# Altium PCB KOTROLER_TRANSPORTA.PcbDoc (part 2 of 4)
Units mm, origin at the board's own origin, x right, y up, seen from the top; angles counter-clockwise.
Board outline 160 x 100 mm, 2 copper layers (Top Layer, Bottom Layer); 436 components, 440 nets, 1414 pads, 154 vias.
Unrouted connection lines stored in the file: 1.
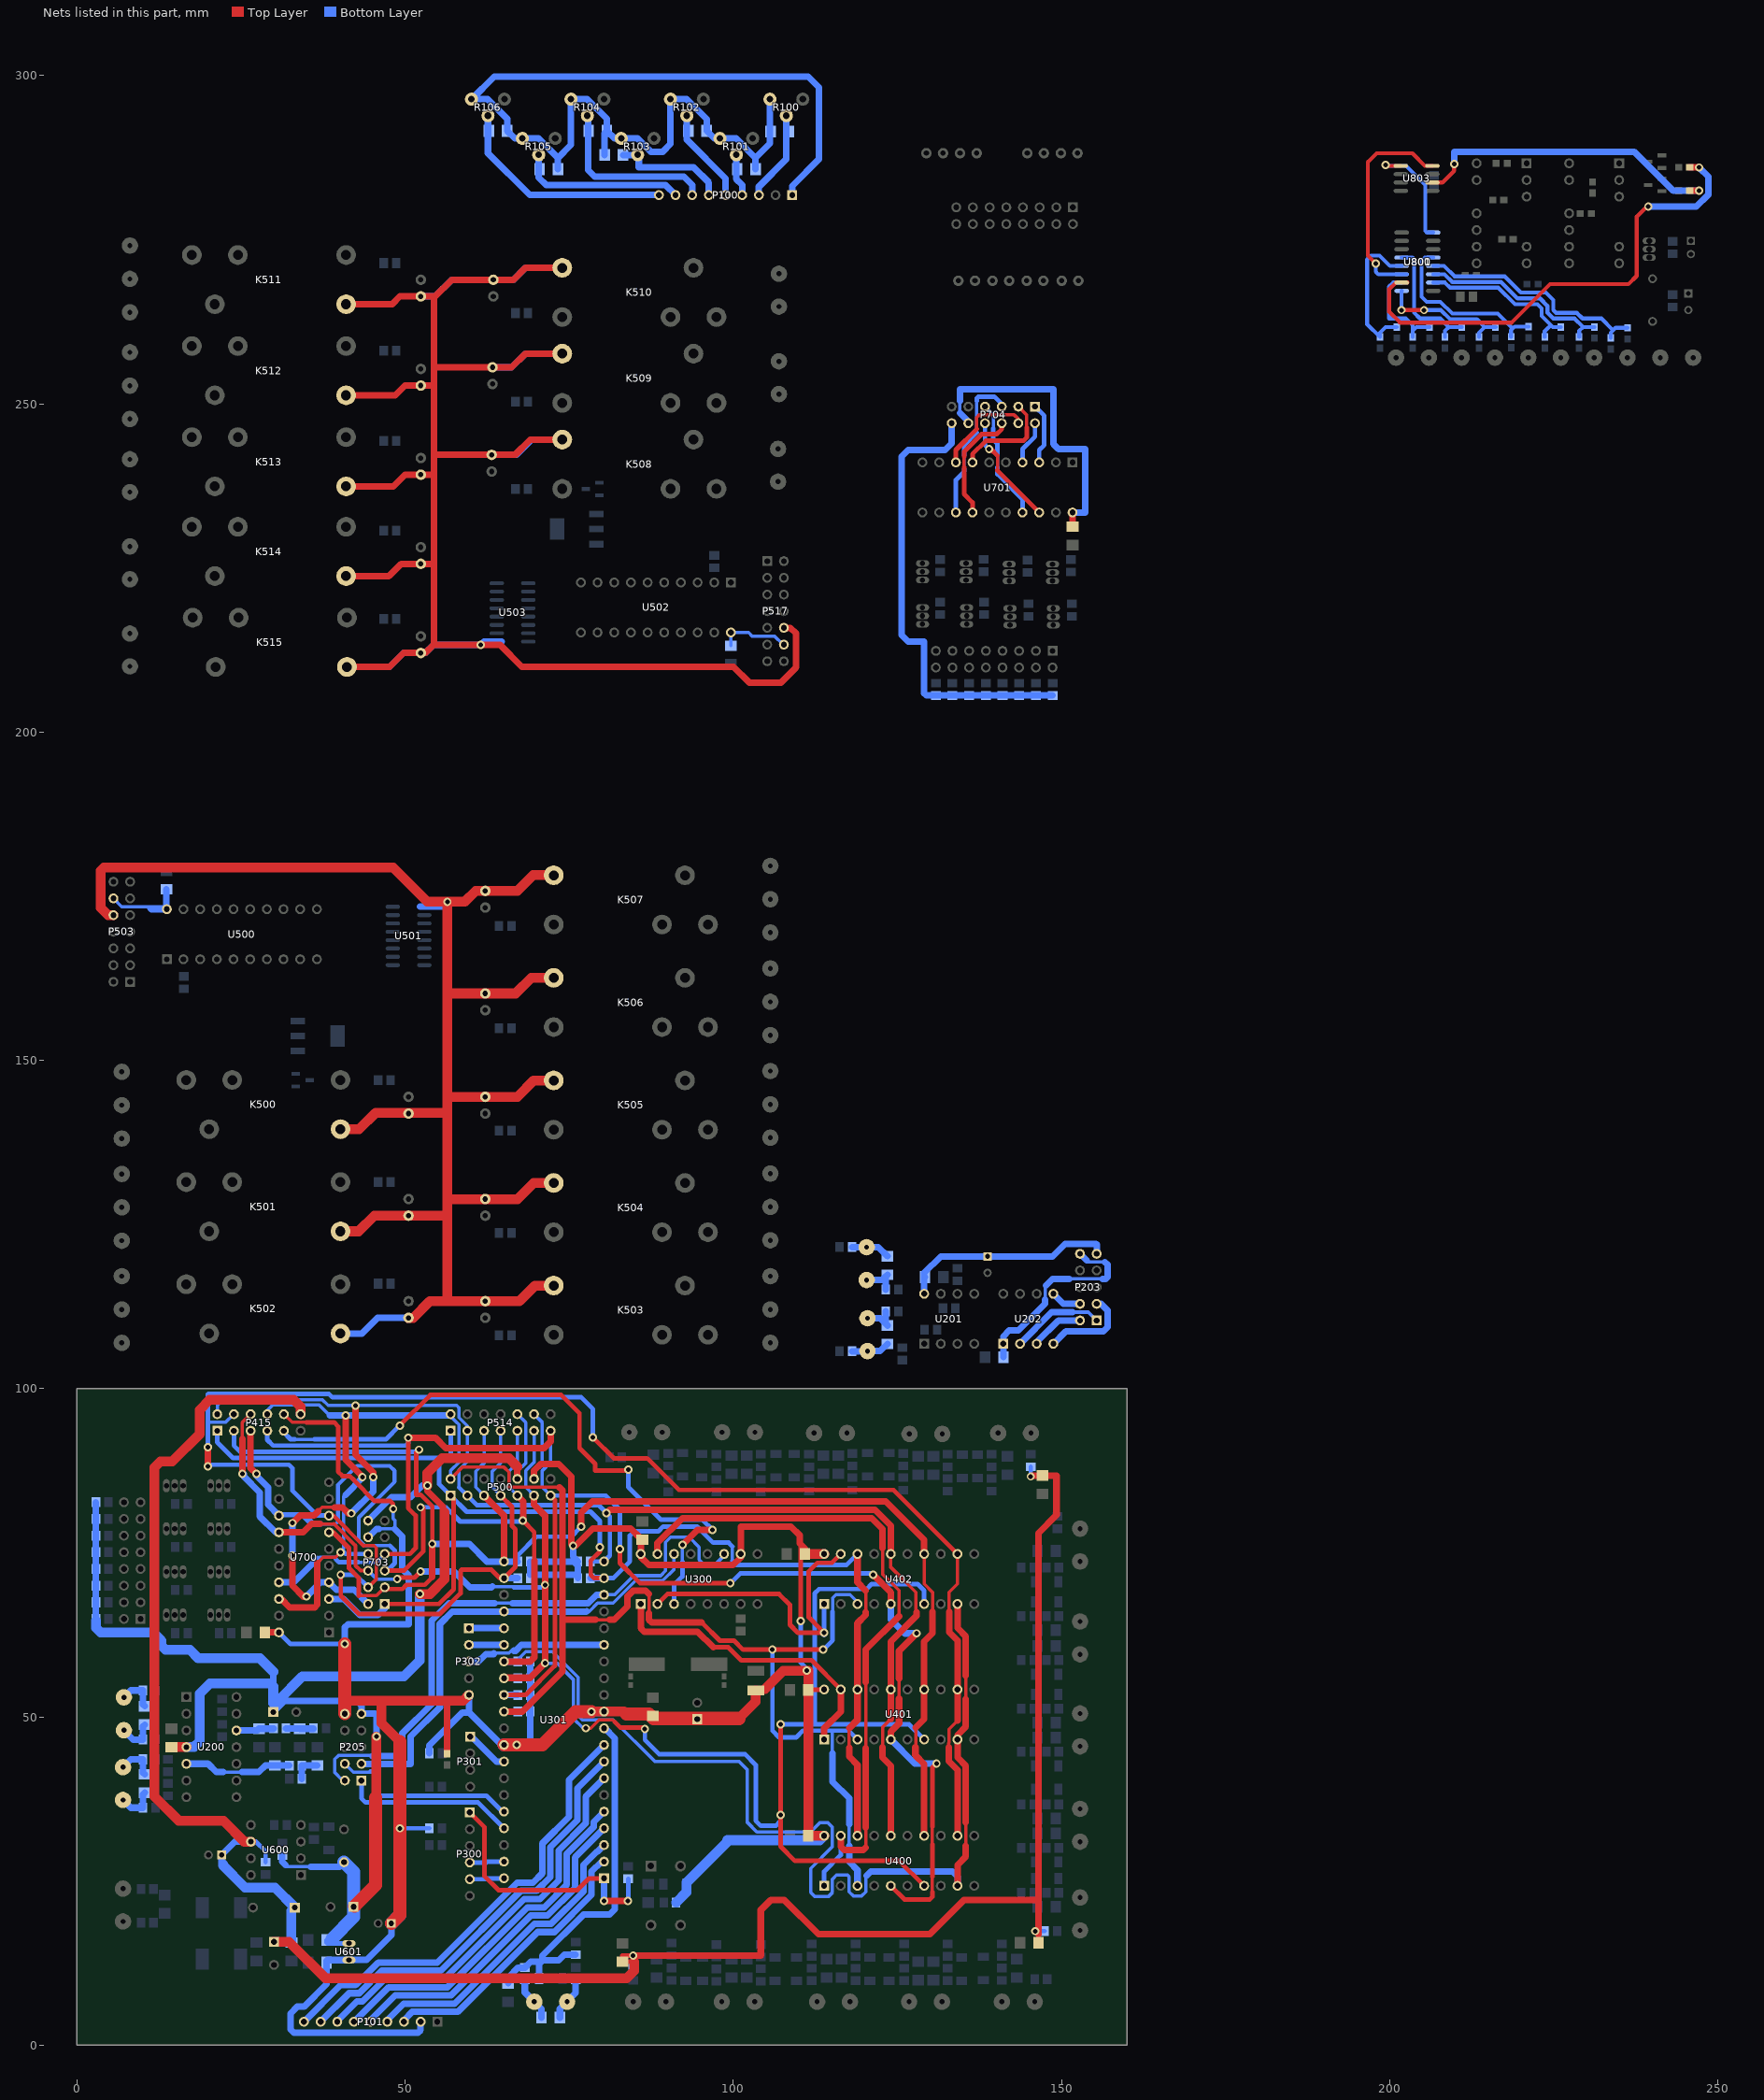
[diagram p2: the nets of this part, all layers, seen from the top]

## Via types
v1: diameter 1.27, hole 0.711, Top Layer to Bottom Layer, 154 vias

## Nets (pads, with @x,y where several pads share a name; then routed paths per layer and width w, separated by ;. In a path a pad name is that pad's centre, name@x,y a point inside that pad or via, vN(x,y) a via of type N, cw(c..) or ccw(c..) an arc to the next point about the centre after c; other vN are vias at no path point)
+5V: C300.1 C301.2 C302.1 C401.1 C411.1 C421.1 C607.2 C608.1 C700.1 D300.1 D602.2 P101.2 P205.10 P302.5 P415.10 P500.13 P514.13 P703.10 R300.1 R303.1 R305.2 R306.2 R307.2 R308.2 R309.2 R310.2 R311.2 R312.2 R313.2 R605.1 U300.10 U300.16 U301.11 U301.32 U400.20 U401.20 U402.20 U601.1 U700.20 | length 487.4
  Top Layer w0.5: P415.10@31.529,96.135 32.783,94.881 34.958,94.881
  Top Layer w0.7: 34.958,94.881 39.17,94.881 39.784,94.267 39.784,87.384 40.456,86.712 41.558,86.712 42.228,86.042 42.228,86.007 45.333,82.902 47.72,82.902 48.166,82.456 v1(48.166,81.694) ; v1@75.319,76.335 v1(75.565,76.088) ; C301.2@87.155,50.468 C301.2@87.155,50.722 ; D300.1@103.411,54.032 104.832,54.032 104.832,54.286 ; 109.95,76.436 110.244,76.143 v1(110.244,64.625) ; C421.1@110.907,74.836 C421.1@110.907,75.62 ; v1@111.12,57.348 v1@111.158,57.31 ; v1(111.158,57.056) v1@111.158,57.31 ; v1@111.158,57.386 v1@111.158,57.31 ; C411.1@111.415,54.135 113.825,54.135 U401.20@113.825,54.199 ; v1@111.415,57.053 v1@111.158,57.31
  Top Layer w1: C700.1@28.611,62.898 U700.20@30.767,62.898 ; R313.2@56.388,44.411 56.388,52.23 ; U301.32@64.549,45.753 U301.32@65.057,45.753 ; P500.13@69.629,86.266 69.629,87.536 70.645,88.552 73.373,88.552 75.311,86.614 75.311,76.327 75.565,76.073 75.946,76.073 78.613,78.74 84.328,78.74 85.885,77.183 U300.16@85.885,74.836 85.885,74.389 87.122,73.152 99.949,73.152 101.125,74.328 U300.10@101.125,74.836 101.125,78.994 108.778,78.994 110.091,77.681 110.091,76.436 C421.1@110.907,75.62
  Top Layer w1.5: 40.8,52.484 58.834,52.484 P302.5@59.723,53.373 ; 46.388,52.23 46.388,49.055 49.207,46.236 ; v1(78.392,50.833) U301.11@80.297,50.833 83.345,50.833 ; 100.838,49.784 103.411,52.357 D300.1@103.411,54.032 ; 104.832,54.286 107.602,57.056 v1(111.158,57.056) ; C421.1@110.907,74.836 U402.20@113.825,74.836 ; v1@111.415,57.053 C411.1@111.415,54.135 C401.1@111.415,31.91 U400.20@113.825,31.91
  Top Layer w2: P205.10@40.8,50.499 40.8,52.484 v1(40.8,61.12) ; C608.1@47.896,18.575 49.207,19.886 49.207,46.236 ; U301.32@65.057,45.753 v1(66.962,45.753) 70.899,45.753 75.979,50.833 v1(78.392,50.833) ; 83.71,50.468 C301.2@87.155,50.468 ; C301.2@87.301,50.322 87.839,49.784 100.838,49.784
  Bottom Layer w0.5: 46.007,78.646 48.42,78.646 48.42,79.956 48.166,80.21 v1(48.166,81.694) ; P500.13@69.629,86.266 69.629,87.536 70.899,88.806 70.899,94.865 P514.13@69.629,96.135
  Bottom Layer w0.7: U700.20@30.767,62.898 32.545,61.12 v1(40.8,61.12) ; v1(49.207,33.053) R300.1@53.693,33.053 ; D602.2@92.867,24.544 D602.2@92.867,24.773 ; v1(110.244,64.625) 110.244,58.301 111.158,57.386 v1@111.158,57.31
  Bottom Layer w1: v1(40.8,61.12) 40.8,63.66 41.275,64.135 50.579,64.135 50.579,71.534 49.563,72.55 49.563,77.503 48.42,78.646 ; P703.10@44.356,77.376 45.626,78.646 46.007,78.646 ; C608.1@47.896,18.575 47.896,16.786 44.113,13.003 41.451,13.003 U601.1@41.435,12.987 38.136,12.987 38.009,12.86 C607.2@38.009,12.606 38.009,9.307 34.577,5.875 33.561,5.875 32.545,4.859 32.545,2.446 33.053,1.938 51.976,1.938 52.357,2.319 P101.2@52.357,3.589 ; R303.1@53.693,44.483 53.693,45.692 58.707,50.706 59.723,50.706 ; P302.5@59.723,53.373 59.723,50.706 ; U301.32@65.057,45.753 64.676,45.753 59.723,50.706 ; v1(66.962,45.753) 68.232,45.753 69.055,46.576 R312.2@69.055,50.833 R311.2@69.055,53.373 R310.2@69.055,55.913 R309.2@69.055,58.453 ; v1(75.565,76.088) 75.565,74.427 R306.2@76.299,73.693 ; R305.2@76.299,71.153 R305.2@76.299,71.661 ; R305.2@76.299,71.661 69.055,71.661 R307.2@69.055,73.693 75.659,73.693 76.299,73.053 R305.2@76.299,71.661
  Bottom Layer w1.5: v1(78.392,50.833) U301.11@80.297,50.833 ; R605.1@91.28,21.75 92.867,23.337 D602.2@92.867,24.544 ; D602.2@92.867,24.773 99.082,30.988 ; 99.082,31.242 113.157,31.242 U400.20@113.825,31.91
  Bottom Layer w2: C608.1@47.896,18.575 49.207,19.886 v1(49.207,33.053) ; U301.32@65.057,45.753 v1(66.962,45.753)
+5V_DAC: C212.2 P203.10 U202.1 | length 31.1
  Bottom Layer w0.5: 147.496,113.587 147.496,115.619 147.607,115.73 ; 151.163,116.746 156.211,116.746 ; 153.83,119.54 154.068,119.302 156.608,119.302
  Bottom Layer w1: C212.2@141.133,104.808 141.13,104.811 U202.1@141.13,106.84 141.13,107.983 142.019,108.872 143.448,108.872 147.496,112.92 147.496,113.587 ; 147.607,115.73 148.623,116.746 151.163,116.746 ; P203.10@152.814,120.556 153.83,119.54 ; 156.211,116.746 156.751,116.746 157.005,117 157.005,118.905 156.608,119.302
+5V_O1: C501.1 P517.12 U502.20 | length 10.9
  Bottom Layer w0.5: C501.1@99.63,213.157 U502.20@99.63,215.186 102.297,215.186 102.853,214.631 106.282,214.631 107.568,213.345 P517.12@107.695,213.345
+5V_O2: C500.1 P503.12 U500.20 | length 14.3
  Bottom Layer w0.5: P503.12@5.558,174.681 6.828,173.411 13.305,173.411 13.622,173.094 U500.20@13.686,173.03
  Bottom Layer w1: 11.209,173.157 11.336,173.03 U500.20@13.686,173.03 ; U500.20@13.622,173.094 C500.1@13.622,176.075
+5V_SIG2: C701.1 P704.10 U701.20 | length 47.2
  Top Layer w1: C701.1@151.671,231.303 U701.20@151.671,233.459
  Bottom Layer w0.5: 134.526,248.572 134.526,250.477
  Bottom Layer w1: 134.526,248.572 135.796,247.302 P704.10@135.796,247.048 ; 134.526,250.477 134.526,252.255 148.75,252.255 148.75,243.873 149.512,243.111 153.576,243.111 153.576,233.459 U701.20@151.671,233.459
+12V: C200.2 C201.1 C606.1 C609.2 L602.2 P205.9 P500.12 P514.12 P703.12 R603.2 R704.2 R707.2 R710.2 R712.2 R714.2 R718.2 R720.2 R722.2 U200.4 U601.3 | length 251.6
  Top Layer w1: v1(53.373,85.25) 53.373,84.422 55.753,82.042 55.753,81.407 ; P500.12@67.089,86.266 67.089,88.105
  Top Layer w1.5: C200.2@14.384,45.416 14.387,45.419 U200.4@16.67,45.419 ; 45.466,37.719 45.626,37.879 v1(45.626,47.023) ; v1(52.23,68.74) 53.754,68.74 56.007,70.993 56.007,81.153 ; v1(53.373,85.25) 53.373,87.155 55.626,89.408 65.786,89.408 67.089,88.105
  Top Layer w2: C606.1@42.271,21.229 45.466,24.424 45.466,37.719
  Bottom Layer w0.5: 31.783,27.465 32.021,27.227 35.577,27.227 35.593,27.211 ; P500.12@67.089,86.266 67.089,87.409 68.359,88.679 68.359,94.865 P514.12@67.089,96.135
  Bottom Layer w0.7: C609.2@38.009,15.654 C609.2@38.009,16.035 ; C609.2@38.111,15.552 38.136,15.527 U601.3@41.435,15.527
  Bottom Layer w1: R722.2@2.893,82.71 R720.2@2.893,80.17 R718.2@2.893,77.63 R714.2@2.893,75.09 R712.2@2.893,72.55 R710.2@2.893,70.01 R707.2@2.893,67.47 R704.2@2.893,64.93 2.893,64.671 R704.2@2.921,64.643 ; 29.906,54.615 29.906,56.901 ; 30.64,52.484 30.259,52.484 29.906,52.131 C201.1@29.906,50.753 31.637,52.484 42.625,52.484 43.34,51.769 P205.9@43.34,50.499 45.452,50.499 45.626,50.325 v1(45.626,47.023) ; R603.2@31.275,28.928 31.275,27.973 31.783,27.465 ; 35.593,27.211 39.998,27.211 L602.2@40.673,27.886 ; P703.12@44.356,79.916 47.912,83.472 50.833,83.472 52.611,85.25 v1(53.373,85.25)
  Bottom Layer w1.5: R704.2@2.921,64.643 2.921,63.566 3.622,62.865 11.623,62.865 12.86,61.628 12.86,60.866 13.495,60.231 17.178,60.231 18.448,58.961 27.846,58.961 29.906,56.901 ; U200.4@16.67,45.419 17.813,45.419 18.702,46.308 18.702,53.547 20.273,55.118 29.403,55.118 ; 29.906,52.131 29.906,54.615 ; 30.64,52.484 34.323,56.167 49.817,56.167 52.23,58.58 v1(52.23,68.74)
  Bottom Layer w2: 38.862,16.256 42.169,19.563 42.169,21.877 42.169,26.39 L602.2@40.673,27.886
+12V_DAC: C208.2 C209.1 P203.9 U201.8 | length 32.9
  Bottom Layer w1: U201.8@129.065,114.46 C208.2@129.065,116.876 ; C208.2@129.189,117 C208.2@129.065,116.876 ; P203.9@155.354,120.556 155.354,121.953 155.227,122.08 150.528,122.08 148.603,120.155 C209.1@138.717,120.155 131.585,120.155 129.065,117.635 C208.2@129.065,116.876
+12V_O1: D508.1 D509.1 D510.1 D511.1 D512.1 D513.1 D514.1 D515.1 K508.1 K509.1 K510.1 K511.1 K512.1 K513.1 K514.1 K515.1 P517.10 U503.9 | length 323.5
  Top Layer w1: K514.1@41.004,223.778 47.516,223.778 49.376,225.638 D514.1@52.386,225.638 54.222,225.638 ; K513.1@41.004,237.431 48.215,237.431 49.998,239.214 D513.1@52.386,239.214 54.361,239.214 ; K512.1@41.004,251.305 48.5,251.305 49.986,252.791 D512.1@52.386,252.791 54.272,252.791 ; K511.1@41.004,265.18 48.024,265.18 49.211,266.367 D511.1@52.386,266.367 54.227,266.367 54.386,266.208 ; K515.1@41.131,209.935 47.643,209.935 49.769,212.061 D515.1@52.386,212.061 53.071,212.061 54.386,213.376 ; K508.1@73.928,244.567 69.067,244.567 66.737,242.237 D508.1@63.181,242.237 54.513,242.237 54.386,242.11 ; K509.1@73.928,257.648 68.305,257.648 66.229,255.572 D509.1@63.308,255.572 54.513,255.572 54.386,255.445 ; K510.1@73.928,270.729 68.305,270.729 66.483,268.907 D510.1@63.435,268.907 57.085,268.907 54.386,266.208 ; P517.10@107.695,215.885 108.711,215.885 109.536,215.059 109.536,209.852 107.25,207.566 102.421,207.566 100.008,209.979 67.766,209.979 64.464,213.281 v1(61.53,213.281) 54.481,213.281 54.386,213.376 ; 54.386,213.376 54.386,242.11 ; 54.386,242.11 54.386,255.445 ; 54.386,255.445 54.386,266.208
  Bottom Layer w1: K515.1@41.131,209.935 47.643,209.935 49.769,212.061 D515.1@52.386,212.061 53.071,212.061 54.291,213.281 v1(61.53,213.281) 62.038,213.789 U503.9@63.956,213.789 U503.9@64.705,213.789 ; D511.1@52.386,266.367 54.545,266.367 57.085,268.907 D510.1@63.435,268.907 66.483,268.907 68.305,270.729 K510.1@73.928,270.729 ; D508.1@63.181,242.237 66.918,242.237 69.248,244.567 K508.1@73.928,244.567 ; D509.1@63.308,255.572 66.229,255.572 68.305,257.648 K509.1@73.928,257.648
+12V_O2: D500.1 D501.1 D502.1 D503.1 D504.1 D505.1 D506.1 D507.1 K500.1 K501.1 K502.1 K503.1 K504.1 K505.1 K506.1 K507.1 P503.10 U501.9 | length 354.8
  Top Layer w1: K507.1@72.596,178.237 K507.1@72.629,178.204
  Top Layer w1.5: P503.10@5.558,172.141 4.732,172.141 3.589,173.284 3.589,178.872 4.097,179.38 48.166,179.38 53.373,174.173 v1(56.421,174.173) ; K501.1@40.15,123.978 42.918,123.978 45.298,126.358 D501.1@50.516,126.358 56.358,126.358 56.421,126.294 ; K500.1@40.15,139.535 42.992,139.535 45.499,142.042 56.421,142.042 ; D502.1@50.516,110.8 51.214,110.8 53.754,113.34 56.421,113.34 ; K507.1@72.596,178.237 69.502,178.237 67.089,175.824 D507.1@62.2,175.824 60.739,175.824 59.088,174.173 v1(56.421,174.173) ; K503.1@72.629,115.72 69.789,115.72 67.409,113.34 D503.1@62.2,113.34 56.421,113.34 ; K504.1@72.629,131.341 69.596,131.341 67.089,128.834 56.421,128.834 ; K505.1@72.629,146.962 69.596,146.962 67.089,144.455 D505.1@62.2,144.455 56.548,144.455 56.421,144.328 ; K506.1@72.629,162.583 69.215,162.583 66.835,160.203 D506.1@62.2,160.203 56.421,160.203 ; 56.421,113.34 56.421,126.294 ; 56.421,126.294 56.421,128.834 ; 56.421,128.834 56.421,142.042 ; 56.421,142.042 56.421,144.328 ; 56.421,144.328 56.421,160.203 ; 56.421,160.203 v1(56.421,174.173)
  Bottom Layer w0.7: K507.1@72.596,178.237 K507.1@72.629,178.204
  Bottom Layer w1: K502.1@40.15,108.42 43.426,108.42 45.806,110.8 D502.1@50.516,110.8 ; K501.1@40.15,123.978 42.918,123.978 45.298,126.358 D501.1@50.516,126.358 ; K500.1@40.15,139.535 42.992,139.535 45.372,141.915 D500.1@50.516,141.915 ; U501.9@52.23,173.411 U501.9@52.916,173.411 55.659,173.411 v1(56.421,174.173) 59.088,174.173 60.739,175.824 D507.1@62.2,175.824 67.089,175.824 69.502,178.237 K507.1@72.596,178.237 ; D503.1@62.2,113.34 67.216,113.34 69.629,115.753 72.596,115.753 K503.1@72.629,115.72 ; D504.1@62.2,128.898 67.153,128.898 69.596,131.341 K504.1@72.629,131.341 ; D505.1@62.2,144.455 67.089,144.455 69.629,146.995 72.596,146.995 K505.1@72.629,146.962 ; D506.1@62.2,160.203 66.835,160.203 69.375,162.743 72.469,162.743 K506.1@72.629,162.583
+12V_SIG2: P704.12 R705.2 R709.2 R711.2 R713.2 R716.2 R719.2 R721.2 R723.2 | length 70.1
  Bottom Layer w1: P704.12@133.256,247.048 133.256,244 132.24,242.984 126.652,242.984 125.636,241.968 125.636,214.79 126.652,213.774 129.065,213.774 129.065,205.9 129.38,205.585 R723.2@130.843,205.585 R721.2@133.383,205.585 R719.2@135.923,205.585 R716.2@138.463,205.585 R713.2@141.003,205.585 R711.2@143.543,205.585 R709.2@146.083,205.585 R705.2@148.623,205.585
+24V: C400.2 C410.2 C420.2 C600.1 C603.2 C604.1 D600.2 P415.12 R400.2 R418.2 R436.2 R602.1 U600.6 | length 349.7
  Top Layer w0.7: v1(84.742,13.647) 83.091,13.647 C400.2@83.091,12.73 84.869,12.73 ; v1(145.967,17.396) 146.467,16.896 C410.2@146.467,15.618 ; 146.464,22.106 146.467,22.106 ; 146.464,35.469 146.467,35.469
  Top Layer w1: v1(84.742,13.647) 104.173,13.647 104.173,20.607 105.672,22.106 107.754,22.106 112.936,16.924 129.941,16.924 135.123,22.106 146.464,22.106 ; v1@145.437,86.777 149.225,86.777 149.225,80.772 146.467,78.014 146.467,35.469 146.467,22.106 146.467,16.896
  Top Layer w1.5: U600.6@26.489,31.021 25.494,31.021 22.344,34.171 15.527,34.171 11.811,37.887 11.811,88.006 12.738,88.933 14.511,88.933 18.669,93.091 18.669,96.774 20.193,98.298 33.016,98.298 34.069,97.245 P415.12@34.069,96.135 ; C600.1@30.005,15.753 32.319,15.753 37.879,10.193 83.726,10.193 84.869,11.336 84.869,12.73
  Bottom Layer w0.7: U600.6@26.489,31.021 27.272,31.021 28.735,29.558 R602.1@28.735,27.907 ; R400.2@84.742,11.778 v1(84.742,13.647) ; v1(145.307,86.647) R436.2@145.307,88.11 ; v1(145.967,17.396) R418.2@147.419,17.396
  Bottom Layer w1: 22.225,27.559 22.028,27.756 C604.1@22.028,28.989 24.06,31.021 U600.6@26.489,31.021 ; C600.1@30.005,15.753 32.576,15.753 C603.2@32.672,15.657 ; D600.2@32.672,20.48 D600.2@33.18,20.988
  Bottom Layer w1.5: 22.225,27.559 22.225,27.432 25.621,24.036 30.133,24.036 D600.2@33.18,20.988 ; C603.2@32.672,15.657 D600.2@32.672,20.48
AN0_IN: P101.3 U301.2 | length 42.8
  Bottom Layer w1: P101.3@49.817,3.589 49.817,3.843 51.067,5.093 58.029,5.093 70.194,17.258 72.743,17.258 78.392,22.907 78.392,26.449 79.916,27.973 U301.2@80.297,27.973
AN1_IN: P101.4 U301.3 | length 46.7
  Bottom Layer w1: P101.4@47.277,3.589 47.277,3.843 49.781,6.347 57.51,6.347 69.675,18.512 72.224,18.512 77.138,23.426 77.138,27.481 79.134,29.477 79.261,29.477 U301.3@80.297,30.513
AN2_IN: P101.5 U301.4 | length 50.7
  Bottom Layer w1: P101.5@44.737,3.589 44.737,3.843 48.495,7.601 56.99,7.601 69.155,19.766 71.704,19.766 75.884,23.946 75.884,28.64 U301.4@80.297,33.053
AN3_IN: P101.6 U301.5 | length 54.6
  Bottom Layer w1: P101.6@42.197,3.589 47.463,8.855 56.471,8.855 68.636,21.02 71.185,21.02 74.63,24.465 74.63,29.159 78.741,33.27 78.741,34.037 U301.5@80.297,35.593
AN4_IN: P101.7 U301.7 | length 61.1
  Bottom Layer w1: P101.7@39.657,3.589 39.657,3.711 42.628,6.682 43.517,6.682 46.944,10.109 55.951,10.109 68.116,22.274 70.534,22.274 73.376,25.116 73.376,29.679 77.487,33.79 77.487,37.863 U301.7@80.297,40.673
AN5_IN: P101.8 U301.8 | length 65.1
  Bottom Layer w1: P101.8@37.117,3.589 41.464,7.936 42.997,7.936 46.424,11.363 55.432,11.363 67.597,23.528 70.01,23.528 72.122,25.64 72.122,30.198 76.233,34.309 76.233,39.149 U301.8@80.297,43.213
AN6_IN: P101.9 U301.9 | length 69.1
  Bottom Layer w1: P101.9@34.577,3.589 40.178,9.19 42.464,9.19 45.891,12.617 54.908,12.617 66.073,23.782 66.078,23.782 67.078,24.782 69.491,24.782 70.868,26.159 70.868,30.718 74.963,34.813 74.963,40.419 U301.9@80.297,45.753
CLOCK: P205.2 U300.11 U301.18 | length 92.9
  Bottom Layer w0.5: P205.2@40.8,40.339 40.499,40.339 39.276,41.562 39.276,43.594 39.815,44.133 44.991,44.133 44.991,44.086 ; 63.66,67.343 66.327,67.343 ; U301.18@80.297,68.613 81.898,68.613 84.811,71.526 88.925,71.526 89.679,72.28 89.679,76.598 90.457,77.376 93.259,77.376 94.775,75.86 94.775,73.947 95.283,73.439 97.442,73.439 98.585,74.582 U300.11@98.585,74.836
  Bottom Layer w1: 44.991,44.086 49.579,44.086 49.579,47.542 54.008,51.971 54.008,64.676 56.675,67.343 63.66,67.343 ; 66.327,67.343 77.884,67.343 79.154,68.613 U301.18@80.297,68.613
DAC1_CS: P205.1 U301.37 | length 26.3
  Bottom Layer w0.7: P205.1@43.34,40.339 43.34,37.625 43.975,36.99 61.12,36.99 U301.37@65.057,33.053
DAC1_LATCH: P205.4 U301.36 | length 28.9
  Bottom Layer w0.5: P205.4@40.8,42.879 42.086,41.593 44.641,41.593 44.737,41.689
  Bottom Layer w0.7: 44.737,41.689 45.245,41.689 45.499,41.435 45.499,38.768 46.261,38.006 62.39,38.006 U301.36@64.803,35.593
  Bottom Layer w1: U301.36@64.803,35.593 U301.36@65.057,35.593
DAC_CLK: P203.2 U202.3 | length 8.2
  Bottom Layer w1: U202.3@146.21,106.84 146.21,107.094 149.512,110.396 P203.2@152.814,110.396
DAC_CS: P203.1 U202.2 | length 14.2
  Bottom Layer w0.5: 151.671,111.666 154.084,111.666 P203.1@155.354,110.396
  Bottom Layer w1: U202.2@143.67,106.84 148.496,111.666 151.671,111.666
DAC_DATA: P203.3 U202.4 | length 13.9
  Bottom Layer w1: U202.4@148.75,106.84 150.655,108.745 156.37,108.745 157.005,109.38 157.005,111.92 155.989,112.936 P203.3@155.354,112.936
DAC_LATCH: P203.4 U202.5 | length 4.7
  Bottom Layer w1: U202.5@148.75,114.46 150.274,112.936 P203.4@152.814,112.936
DATA: P205.3 U300.14 U301.24 | length 72.2
  Bottom Layer w0.5: 77.63,66.089 78.05,66.089 79.304,67.343 81.694,67.343 85.123,70.772 89.237,70.772 90.965,72.5 U300.14@90.965,74.836
  Bottom Layer w1: P205.3@43.34,42.879 43.387,42.832 50.833,42.832 50.833,47.023 55.278,51.468 55.278,64.168 57.183,66.073 U301.24@65.057,66.073 77.614,66.073 77.63,66.089
DATA0: P415.1 P500.1 P514.1 P703.1 R305.1 U301.19 U400.18 U401.18 U402.18 U700.3 | length 215.8
  Top Layer w0.5: 117.635,45.309 117.635,48.293 ; 120.175,65.946 120.175,69.248
  Top Layer w0.7: P703.1@46.896,67.216 55.151,67.216 57.404,69.469 57.404,83.251 P500.1@56.929,83.726 ; 79.662,75.217 78.265,73.82 78.265,71.661 78.773,71.153 U301.19@80.297,71.153
  Top Layer w1: 117.635,45.309 117.635,43.975 118.905,42.705 U400.18@118.905,31.91 ; 117.635,48.293 118.905,49.563 U401.18@118.905,54.199 118.905,64.295 120.175,65.565 120.175,65.946 ; U402.18@118.905,74.836 118.905,70.518 120.175,69.248
  Bottom Layer w0.5: 99.855,73.82 99.855,75.979
  Bottom Layer w0.7: P415.1@21.369,93.595 21.369,91.854 23.785,89.438 55.148,89.438 55.151,89.441 ; P514.1@56.929,93.595 56.929,89.441 55.151,89.441 ; v1(79.662,75.852) 79.662,79.85 78.232,81.28 59.375,81.28 P500.1@56.929,83.726 55.151,85.504 55.151,89.441 ; U301.19@80.297,71.153 81.694,71.153 84.234,73.693 84.234,77.63 84.869,78.265 88.552,78.265 89.314,79.027 94.458,79.027 96.934,76.551 99.284,76.551 99.855,75.979 ; 99.855,73.82 100.49,73.185 117.254,73.185 U402.18@118.905,74.836
  Bottom Layer w1: U700.3@38.387,67.978 40.673,67.978 43.086,65.565 45.88,65.565 46.896,66.581 P703.1@46.896,67.216 ; R305.1@78.199,71.153 U301.19@80.297,71.153
DATA0_SIG2: P704.1 U701.3 | length 9.4
  Bottom Layer w0.7: P704.1@145.956,249.588 147.353,248.191 147.353,243.746 146.591,242.984 U701.3@146.591,241.079
DATA1: P415.2 P500.2 P514.2 P703.2 R306.1 U301.20 U400.16 U401.16 U402.16 U700.4 | length 235.6
  Top Layer w0.5: 36.736,81.313 37.355,81.932 39.26,81.932 ; 122.715,45.372 122.715,48.42 123.985,49.69 ; U402.16@123.985,74.836 123.985,72.804 127.795,68.994 127.795,66.073 127.922,65.946
  Top Layer w1: v1(32.799,74.582) 32.799,70.01 34.45,68.359 v1(34.958,68.359) ; v1(32.799,79.535) 33.942,80.678 36.101,80.678 36.736,81.313 ; 39.26,81.932 40.435,81.932 41.341,81.026 v1(41.783,81.026) ; v1(42.451,97.442) 42.451,89.949 45.118,87.282 v1(45.118,86.52) ; v1(80.678,81.059) 81.17,81.551 121.583,81.551 123.969,79.165 123.969,74.852 U402.16@123.985,74.836 ; 122.715,45.372 122.715,43.848 123.985,42.578 U400.16@123.985,31.91 ; 123.985,49.69 U401.16@123.985,54.199 123.985,61.501 127.922,65.438 127.922,65.946
  Bottom Layer w0.5: P415.2@21.369,96.135 21.369,97.442 22.25,98.323 37.379,98.323 38.26,97.442 v1(42.451,97.442) 57.818,97.442 58.183,97.077 58.183,95.642 59.469,94.356 P514.2@59.469,93.595 59.469,88.933 58.199,87.663 58.199,84.996
  Bottom Layer w0.6: 58.199,84.996 P500.2@59.469,83.726
  Bottom Layer w0.7: P500.2@59.469,83.726 60.899,82.296 79.441,82.296 v1(80.678,81.059) 81.186,80.551 81.186,74.582 U301.20@80.297,73.693 R306.1@78.199,73.693
  Bottom Layer w1: v1(32.799,74.582) v1(32.799,79.535) ; v1(34.958,68.359) 37.117,70.518 U700.4@38.387,70.518 39.53,69.375 42.197,69.375 P703.2@44.356,67.216 ; v1(41.783,81.026) 45.118,84.361 v1(45.118,86.52)
DATA1_SIG2: P704.2 U701.4 | length 6.8
  Bottom Layer w0.7: U701.4@144.051,241.079 144.051,243.111 145.956,245.016 P704.2@145.956,247.048
DATA2: P415.3 P500.3 P514.3 P703.3 R307.1 U301.21 U400.14 U401.14 U402.14 U700.7 | length 230.4
  Top Layer w0.5: 42.959,68.486 45.626,68.486 P703.3@46.896,69.756 ; 127.732,45.372 127.779,45.42 127.779,48.404 ; U402.14@129.065,74.836 129.065,70.264 130.335,68.994 130.335,66.073
  Top Layer w0.7: U700.7@38.387,78.138 39.022,78.138 41.435,75.725 41.435,72.677 42.959,71.153 42.959,68.486 ; P703.3@47.15,69.502 49.563,69.502 50.198,70.137 52.992,70.137 54.135,71.28 ; v1(52.103,90.711) 51.689,90.297 51.689,83.853 52.357,83.853 54.135,82.075 54.135,76.614 53.881,76.36 v1(54.135,76.36)
  Top Layer w1: P703.3@46.896,69.756 P703.3@47.15,69.502 ; 54.135,71.28 v1(54.135,76.36) ; P500.3@62.009,83.726 65.057,80.678 U301.21@65.057,73.693 ; v1(76.835,79.012) 76.835,81.153 78.519,82.837 123.223,82.837 129.065,76.995 U402.14@129.065,74.836 ; 127.732,45.372 127.732,44.166 129.065,42.832 U400.14@129.065,31.91 ; 127.779,48.404 129.065,49.69 U401.14@129.065,54.199 129.065,61.501 130.335,62.771 130.335,66.073
  Bottom Layer w0.5: P500.3@62.009,83.726 62.009,83.758 60.739,85.028 60.739,87.409 62.009,88.679 P514.3@62.009,93.595
  Bottom Layer w0.7: P415.3@23.909,93.595 23.909,91.346 24.863,90.392 51.784,90.392 v1(52.103,90.711) ; R307.1@67.155,73.693 67.155,74.648 69.977,77.47 75.311,77.47 76.708,78.867 76.835,78.867 v1(76.835,79.012)
  Bottom Layer w1: v1(54.135,76.36) 59.784,76.36 62.451,73.693 U301.21@65.057,73.693 R307.1@67.155,73.693
DATA2_SIG2: P704.3 U701.7 | length 15.8
  Top Layer w0.5: P704.3@143.416,249.588 144.686,248.318 144.686,246.403
  Top Layer w0.7: U701.7@136.431,241.079 136.431,242.349 138.463,244.381 144.178,244.381 144.686,244.889 144.686,246.403
DATA3: P415.4 P500.4 P514.4 P703.4 R308.1 U301.22 U400.12 U401.12 U402.12 U700.8 | length 294.1
  Top Layer w0.5: 43.721,76.106 45.245,76.106 45.61,75.741 45.61,71.042 45.626,71.026 P703.4@44.356,69.756 ; 132.812,45.372 132.812,46.012 132.859,46.059 132.859,48.15 134.145,49.436 ; 132.875,66.073 132.875,68.994 134.145,70.264 U402.12@134.145,74.836
  Top Layer w0.6: U700.8@38.387,80.678 39.087,80.678 43.659,76.106 43.721,76.106
  Top Layer w0.7: v1(40.19,71.697) 40.19,68.461 42.959,65.692 55.278,65.692 58.42,68.834 58.42,72.263 58.58,72.423 63.152,72.423 64.422,71.153 U301.22@65.057,71.153 66.79,72.886 66.79,78.575 66.282,79.083 66.282,81.993 P500.4@64.549,83.726 ; v1(78.613,92.583) 81.788,89.408 86.868,89.408 91.694,84.582 124.399,84.582 U402.12@134.145,74.836
  Top Layer w1: v1(19.947,88.171) v1(19.947,91.092) ; 132.812,45.372 132.812,43.277 134.145,41.943 U400.12@134.145,31.91 ; 132.875,66.073 132.875,62.898 134.145,61.628 U401.12@134.145,54.199 134.145,49.436
  Bottom Layer w0.5: 19.947,94.881 22.655,94.881 P415.4@23.909,96.135 ; P500.4@64.549,83.726 63.279,84.996 63.279,87.409 64.549,88.679 P514.4@64.549,93.595
  Bottom Layer w0.7: v1(19.947,88.171) 20.201,88.425 32.291,88.425 32.799,87.917 32.799,84.488 36.609,80.678 U700.8@38.387,80.678 ; v1(19.947,91.092) v1@19.947,91.498 ; v1@20.201,91.244 v1@19.947,91.498 ; v1(40.19,71.697) 42.415,71.697 P703.4@44.356,69.756 ; v1(78.613,92.583) 78.613,96.901 76.827,98.687 38.92,98.687 38.412,99.195 19.997,99.195 19.947,99.144 19.947,94.881 v1@19.947,91.498
  Bottom Layer w1: U301.22@65.057,71.153 R308.1@67.155,71.153
DATA3_SIG2: P704.4 U701.8 | length 15.6
  Top Layer w0.5: 137.066,246.159 137.066,247.937 137.447,248.318 142.781,248.318 143.416,247.683 P704.4@143.416,247.048
  Top Layer w0.7: U701.8@133.891,241.079 133.891,242.984 137.066,246.159
DATA4: P415.5 P500.5 P514.5 P703.5 R309.1 U301.27 U400.9 U401.9 U402.9 U700.13 | length 294.7
  Top Layer w0.5: 135.399,52.738 135.399,56.278 135.415,56.294 ; 135.415,30.386 135.415,33.942
  Top Layer w0.7: P703.5@46.896,72.296 49.817,72.296 52.738,75.217 v1@52.738,81.948 ; v1@67.978,79.865 69.661,78.182 69.661,73.776
  Top Layer w1: P415.5@26.449,93.595 26.449,87.917 v1(27.338,87.028) ; U301.27@65.057,58.453 69.026,58.453 69.661,59.088 69.661,73.776 ; P500.5@67.089,83.726 67.978,82.837 v1@67.978,79.865 ; U400.9@134.145,24.29 134.145,27.465 135.415,28.735 135.415,30.386 ; U402.9@134.145,67.216 134.145,63.533 135.415,62.263 135.415,56.294 ; 135.399,52.738 135.415,52.754 135.415,48.547 134.145,47.277 U401.9@134.145,46.579 134.145,43.848 135.415,42.578 135.415,33.942
  Bottom Layer w0.5: 36.99,79.408 39.403,79.408 39.751,79.756 ; 42.926,77.028 43.848,76.106 47.658,76.106 ; P500.5@67.089,83.726 65.819,84.996 65.819,87.409 67.089,88.679 P514.5@67.089,93.595 ; R309.1@67.155,58.453 67.155,58.773 68.359,59.977 72.423,59.977 76.36,56.04 76.36,50.198 76.995,49.563 81.694,49.563 88.044,43.213 100.871,43.213 102.141,41.943 102.141,33.942 103.571,32.512 111.76,32.512 113.19,33.942 114.333,33.942 115.095,33.18 115.095,30.259 111.793,26.957 111.793,23.274 112.428,22.639 114.46,22.639 115.095,23.274 115.095,25.323 115.713,25.941 117.381,25.941 117.635,25.687 117.635,23.401 118.27,22.766 119.54,22.766 120.175,23.401 120.175,25.687 120.302,25.814
  Bottom Layer w0.6: 39.751,79.756 39.751,85.344 42.672,88.265 47.625,88.265 48.387,87.503 48.387,85.852 42.926,80.391 42.926,77.028
  Bottom Layer w0.7: P703.5@46.896,72.296 47.277,72.296 48.42,73.439 48.42,75.344 47.658,76.106 ; v1@52.738,81.948 56.218,81.948 58.377,79.789 67.622,79.789 67.927,80.094 v1(67.927,79.916)
  Bottom Layer w0.8: U700.13@30.767,80.678 30.913,80.824 34.431,80.824 34.577,80.678
  Bottom Layer w1: v1(27.338,87.028) 27.338,86.759 29.116,84.981 29.116,82.329 U700.13@30.767,80.678 ; 34.577,80.678 35.847,79.408 36.99,79.408 ; U301.27@65.057,58.453 R309.1@67.155,58.453 ; 120.302,25.814 120.937,26.449 133.383,26.449 134.145,25.687 U400.9@134.145,24.29
  other v1: 52.357,81.948
DATA4_SIG2: P704.5 U701.13 | length 23.5
  Bottom Layer w0.5: 135.161,240.063 135.161,242.222 ; 137.066,245.651 137.066,250.477
  Bottom Layer w0.7: U701.13@133.891,233.459 133.891,238.412 135.161,239.682 135.161,240.063 ; 135.161,242.222 135.161,243.746 137.066,245.651 ; 137.066,250.477 137.066,250.858 137.32,251.112 139.733,251.112 140.876,249.969 P704.5@140.876,249.588
DATA5: P415.6 P500.6 P514.6 P703.6 R310.1 U301.28 U400.7 U401.7 U402.7 U700.14 | length 282.4
  Top Layer w0.5: 25.179,92.362 25.179,94.865 P415.6@26.449,96.135 ; 36.99,79.408 39.149,79.408 ; v1(77.503,48.293) 78.265,48.293 79.535,49.563 81.614,49.563 81.948,49.229
  Top Layer w0.6: 39.149,79.408 42.451,76.106 42.451,73.058 43.213,72.296 P703.6@44.356,72.296
  Top Layer w0.7: v1(48.801,71.026) 49.016,71.241 51.429,71.241 v1(52.357,72.169) ; U301.28@65.057,55.913 67.922,55.913 67.984,55.974 ; 81.948,49.229 82.757,48.42 86.52,48.42 v1(86.52,48.166) ; v1(107.196,48.887) v1(107.196,35.085) 107.196,30.284 109.38,28.1 125.255,28.1 U400.7@129.065,24.29
  Top Layer w1: v1(25.179,87.028) 25.179,92.362 ; U700.14@30.767,78.138 34.45,78.138 35.72,79.408 36.99,79.408 ; U301.28@65.057,55.913 65.118,55.974 67.984,55.974 69.06,55.974 v1(71.296,58.21) v1(71.296,70.137) 71.296,80.678 69.629,82.345 P500.6@69.629,83.726
  Bottom Layer w0.5: 45.626,71.026 v1(48.801,71.026) ; 63.295,69.867 66.343,69.867 66.454,69.756 66.581,69.756 ; P500.6@69.629,83.726 68.359,84.996 68.359,87.536 69.629,88.806 P514.6@69.629,93.595 ; v1(71.296,58.21) 73.123,58.21 75.606,55.728 75.606,49.809 77.122,48.293 v1(77.503,48.293)
  Bottom Layer w0.6: P703.6@44.356,72.296 45.626,71.026
  Bottom Layer w0.7: 66.581,69.756 70.915,69.756 v1(71.296,70.137) ; v1@86.52,48.42 86.52,46.515 88.679,44.356 101.76,44.356 103.411,42.705 103.411,34.196 104.173,33.434 106.459,33.434 107.196,34.171 v1(107.196,35.085) ; v1(107.196,48.887) 112.4,48.887 ; U401.7@129.065,46.579 126.757,48.887 112.4,48.887 ; U402.7@129.065,67.216 129.065,69.248 128.049,70.264 121.069,70.264 120.307,69.502 113.063,69.502 112.4,68.839 112.4,48.887
  Bottom Layer w1: v1(25.179,87.028) 25.433,87.028 25.433,86.647 27.862,84.218 27.862,80.535 30.259,78.138 U700.14@30.767,78.138 ; v1(52.357,72.169) 57.437,72.169 59.875,69.731 63.159,69.731 63.295,69.867 ; U301.28@65.057,55.913 R310.1@67.155,55.913
DATA5_SIG2: P704.6 U701.14 | length 17.8
  Top Layer w0.5: 135.161,240.317 135.161,241.968
  Top Layer w0.7: 135.161,240.317 135.161,236.253 136.431,234.983 U701.14@136.431,233.459 ; 135.161,241.968 135.161,242.73 137.828,245.397 140.114,245.397 140.876,246.159 P704.6@140.876,247.048
DATA6: P415.7 P500.7 P514.7 P703.7 R311.1 U301.29 U400.5 U401.5 U402.5 U700.17 | length 265.6
  Top Layer w0.5: 125.239,52.832 125.239,55.88 ; 130.302,23.368 130.319,23.385 130.319,24.826 130.302,24.843 130.302,25.654 ; 130.302,30.607 130.319,30.624 130.319,32.429 130.302,32.446 130.302,33.274
  Top Layer w0.7: P703.7@46.896,74.836 50.706,74.836 51.595,75.725 51.595,80.678 50.452,81.821 v1(50.452,92.553) ; U301.29@65.057,53.373 68.359,53.373 72.804,57.818 72.804,83.091 P500.7@72.169,83.726 ; v1(82.71,75.565) 82.71,73.439 85.791,70.358 v1(99.543,70.358) v1@99.779,70.594 ; U400.5@123.985,24.29 126.05,22.225 129.921,22.225 130.302,22.606 130.302,23.368 ; 130.302,25.654 130.302,30.607 ; 130.302,33.274 130.302,42.291 v1(130.937,42.926)
  Top Layer w1: v1(50.452,92.553) 54.58,92.553 56.167,90.965 71.153,90.965 72.169,91.981 P514.7@72.169,93.595 ; v1(121.318,71.661) 123.985,68.994 U402.5@123.985,67.216 ; U401.5@123.985,46.579 123.985,47.785 125.239,49.039 125.239,52.832 ; 125.239,55.88 125.239,60.088 v1(127.889,62.738)
  Bottom Layer w0.5: 36.736,74.074 36.99,74.328 39.316,74.328 39.403,74.241 39.403,74.074 ; 42.832,73.566 45.626,73.566 P703.7@46.896,74.836 ; P500.7@72.169,83.726 70.899,84.996 70.899,87.536 72.169,88.806 P514.7@72.169,93.595
  Bottom Layer w0.7: P415.7@28.989,93.595 28.989,92.235 29.878,91.346 50.071,91.346 50.452,91.727 v1(50.452,92.553) ; 39.403,74.074 39.911,73.566 42.832,73.566 ; P500.7@72.169,83.726 80.551,83.726 82.71,81.567 v1(82.71,75.565) ; v1(99.543,70.358) 101.056,71.872 121.107,71.872 v1(121.318,71.661)
  Bottom Layer w1: U700.17@30.767,70.518 33.053,70.518 36.609,74.074 ; U301.29@65.057,53.373 R311.1@67.155,53.373 ; U401.5@123.985,46.579 127.638,42.926 v1(130.937,42.926) ; U402.5@123.985,67.216 123.985,64.864 126.111,62.738 v1(127.889,62.738)
DATA6_SIG2: P704.7 U701.17 | length 18.5
  Bottom Layer w0.5: P704.7@138.336,249.588 139.606,248.318 139.606,246.286 ; 140.241,240.317 140.241,242.095
  Bottom Layer w0.7: 139.606,246.286 139.606,244.508 140.241,243.873 140.241,242.095 ; 140.241,240.317 140.241,239.301 144.051,235.491 U701.17@144.051,233.459
DATA7: P415.8 P500.8 P514.8 P703.8 R312.1 U301.30 U400.3 U401.3 U402.3 U700.18 | length 260.9
  Top Layer w0.5: 36.609,73.439 37.482,74.312 39.387,74.312 v1(40.165,75.09) ; P500.8@56.929,86.266 58.707,88.044 65.057,88.044 65.819,87.282 65.819,84.996 73.5,84.996 ; 79.027,64.803 79.043,64.819 81.17,64.819 ; 87.155,65.819 87.155,68.74
  Top Layer w0.7: 95.189,64.389 97.95,61.628 100.109,61.628 101.481,60.256 v1(105.951,60.256) v1(113.698,60.256)
  Top Layer w1: U700.18@30.767,67.978 31.148,67.978 32.418,66.708 36.228,66.708 36.609,67.089 36.609,73.439 ; v1(40.927,95.918) 40.927,89.187 43.594,86.52 v1(43.467,86.52) ; U301.30@65.057,50.833 67.851,50.833 73.947,56.929 73.947,64.803 ; 73.5,84.996 73.947,84.549 73.947,64.803 ; 79.027,64.803 73.947,64.803 ; 81.17,64.819 81.837,64.819 83.853,66.835 83.853,68.359 84.742,69.248 86.647,69.248 87.155,68.74 ; 87.155,65.819 87.155,64.803 87.569,64.389 95.189,64.389
  Bottom Layer w0.5: P415.8@28.989,96.135 28.989,96.68 29.878,97.569 36.863,97.569 38.514,95.918 ; v1(40.165,75.09) 40.64,75.565 40.64,83.566 40.927,83.853 ; P500.8@56.929,86.266 56.929,87.536 58.199,88.806 58.199,94.538 57.888,94.849 57.871,94.849 56.929,95.791 P514.8@56.929,96.135 ; 115.095,44.483 115.095,47.933 ; 115.111,66.057 115.111,68.121 115.638,68.648 117.762,68.648 118.905,67.505 U402.3@118.905,67.216 ; 117.635,30.386 117.635,33.688
  Bottom Layer w0.7: v1(40.165,75.09) 40.673,75.09 40.927,74.836 P703.8@44.356,74.836 ; v1(105.951,60.256) 105.951,47.912 106.967,46.896 109.558,46.896 110.594,47.933 115.095,47.933 117.551,47.933 U401.3@118.905,46.579 ; v1(113.698,60.256) 115.111,61.669 115.111,66.057
  Bottom Layer w1: 38.514,95.918 v1(40.927,95.918) 56.712,95.918 P514.8@56.929,96.135 ; 40.927,83.853 43.594,86.52 v1(43.467,86.52) ; U301.30@65.057,50.833 R312.1@67.155,50.833 ; 115.095,44.483 115.095,40.165 117.635,37.625 117.635,33.688 ; 117.635,30.386 117.635,27.973 118.905,26.703 U400.3@118.905,24.29
DATA7_SIG2: P704.8 U701.18 | length 17.4
  Top Layer w0.5: 140.241,239.936 140.241,242.095
  Top Layer w0.7: v1(138.971,243.111) 139.225,243.111 140.241,242.095 ; 140.241,239.936 140.241,239.809 U701.18@146.591,233.459
  Bottom Layer w0.7: P704.8@138.336,247.048 138.336,243.746 v1(138.971,243.111) v1@139.225,243.111
DATA_DIR: P302.3 U301.15 | length 21.7
  Bottom Layer w0.5: 63.501,59.739 65.835,59.739 66.2,60.104 66.581,60.104
  Bottom Layer w1: P302.3@59.723,58.453 61.12,58.453 62.263,59.596 63.501,59.596 63.501,59.739 ; 66.581,60.104 66.835,60.104 67.724,60.993 U301.15@80.297,60.993
DATA_RX: P302.2 U301.26 | length 5.3
  Bottom Layer w1: P302.2@59.723,60.993 U301.26@65.057,60.993
DATA_TX: P302.1 U301.25 | length 5.3
  Bottom Layer w1: P302.1@59.723,63.533 U301.25@65.057,63.533
DSP_1: R807.1 U803.2 | length 48.2
  Top Layer w0.6: U803.2@206.489,283.718 208.026,283.718 209.804,285.496 v1(209.804,286.512)
  Top Layer w1: R807.1@245.706,282.448 v1(247.142,282.448)
  Bottom Layer w1: v1(209.804,286.512) 209.804,288.417 237.236,288.417 243.205,282.448 v1(247.142,282.448)
DSP_1_IN_1: R817.2 R824.2 U801.12 | length 27.2
  Bottom Layer w0.6: U801.12@206.616,272.288 205.359,272.288 204.851,271.78 204.851,266.319 205.613,265.557 207.71,265.557 209.523,263.744 216.443,263.744 218.726,261.461 ; R824.2@218.487,260.247 218.487,261.222 218.726,261.461 ; R817.2@221.125,261.771 219.036,261.771 218.726,261.461
DSP_1_IN_2: R818.2 R823.2 U801.15 | length 24.7
  Bottom Layer w0.6: U801.15@206.616,268.478 208.405,268.478 209.167,267.716 216.535,267.716 219.075,265.176 222.504,265.176 223.139,264.541 223.139,263.398 224.829,261.708 R818.2@226.06,261.708 ; R823.2@223.6,260.184 223.6,261.065 224.243,261.708
DSP_1_IN_4: R819.2 R822.2 U801.14 | length 30.3
  Bottom Layer w0.6: U801.14@206.616,269.748 208.342,269.748 209.52,268.57 216.951,268.57 219.456,266.065 222.885,266.065 224.028,264.922 224.028,263.906 224.917,263.017 228.141,263.017 229.45,261.708 ; R822.2@228.854,260.184 228.854,261.112 229.45,261.708 ; R819.2@231.194,261.708 229.45,261.708
DSP_1_IN_8: R820.2 R821.2 U801.13 | length 36
  Bottom Layer w0.6: U801.13@206.616,271.018 208.28,271.018 209.874,269.424 217.494,269.424 219.964,266.954 223.774,266.954 224.917,265.811 224.917,264.287 225.333,263.871 228.495,263.871 229.355,263.01 232.251,263.01 234.041,261.219 ; R821.2@233.68,260.057 233.68,260.858 234.041,261.219 ; R820.2@236.202,261.581 234.403,261.581 234.041,261.219
DSP_10: R808.1 U800.7 | length 75.6
  Top Layer w0.6: U800.7@202.722,268.478 U800.7@201.816,268.478 200.914,268.478 199.898,267.462 199.898,264.033 201.549,262.382 218.567,262.382 224.409,268.224 236.347,268.224 237.617,269.494 237.617,278.511 v1@239.395,280.289
  Top Layer w1: R808.1@245.706,286.004 v1(247.142,286.004)
  Bottom Layer w1: v1(239.395,280.035) 246.693,280.035 248.531,281.873 248.531,284.615 v1(247.142,286.004)
DSP_10_IN_1: R809.1 R813.2 U801.4 | length 22.3
  Bottom Layer w0.6: R813.2@201.041,261.708 199.351,261.708 198.501,260.858 R809.1@198.501,260.184 196.55,262.135 196.55,271.988 197.15,272.588 198.455,272.588 200.025,271.018 U801.4@201.816,271.018
DSP_10_IN_2: R810.1 R814.2 U801.2 | length 15.6
  Bottom Layer w0.6: U801.2@201.816,268.478 200.533,268.478 199.898,267.843 199.898,263.017 202.438,263.017 203.501,261.954 203.501,261.159 ; R810.1@203.501,260.184 203.501,261.159 ; R814.2@206.067,261.708 204.05,261.708 203.501,261.159
DSP_10_IN_4: R811.1 R815.2 U801.5 | length 20.1
  Bottom Layer w0.6: U801.5@201.816,272.288 203.454,272.288 203.708,272.034 203.708,263.906 204.597,263.017 207.694,263.017 209.003,261.708 ; R811.1@208.407,260.184 208.407,261.112 209.003,261.708 ; R815.2@210.983,261.708 209.003,261.708
DSP_10_IN_8: R812.1 R816.2 U801.1 | length 20.3
  Top Layer w0.6: v1(201.803,264.287) v1(205.232,264.287)
  Bottom Layer w0.6: v1(201.803,264.287) 201.803,267.195 U801.1@201.816,267.208 ; v1@205.232,264.033 205.486,264.287 207.772,264.287 209.169,262.89 213.282,262.89 214.464,261.708 ; R812.1@213.614,260.184 213.614,260.858 214.464,261.708 ; R816.2@216.118,261.708 214.464,261.708
EXTRUDER_RUN: C108.1 D100.2 R107.1 R108.1 U301.10 | length 58.1
  Bottom Layer w1: C108.1@65.692,9.434 65.692,10.32 67.215,11.843 R107.1@68.232,11.843 69.121,12.732 70.771,12.732 ; D100.2@70.394,10.193 70.394,12.355 70.771,12.732 ; 71.12,12.954 73.406,12.954 74.267,13.815 R108.1@75.979,13.815 ; U301.10@80.297,48.293 80.424,48.293 81.948,46.769 81.948,20.734 81.153,19.939 77.198,19.939 70.899,13.64 70.899,12.86 70.771,12.732
ICSP_MR: P300.1 R606.2 U301.1 | length 41
  Top Layer w0.7: P300.1@59.85,35.466 62.103,33.213 62.103,25.745 64.226,23.622 76.2,23.622 78.011,25.433 U301.1@80.297,25.433
  Top Layer w1: v1(80.3,21.971) v1(83.947,21.971)
  Bottom Layer w0.7: v1@83.98,21.971 R606.2@83.98,25.372
  Bottom Layer w1: U301.1@80.297,25.433 80.3,25.43 v1(80.3,21.971)
ICSP_PGC: P300.4 U301.39 | length 5.3
  Bottom Layer w0.7: P300.4@59.85,27.846 62.39,27.846 62.517,27.973 U301.39@65.057,27.973
ICSP_PGD: P300.5 U301.40 | length 5.3
  Bottom Layer w0.7: P300.5@59.85,25.306 62.39,25.306 62.517,25.433 U301.40@65.057,25.433
INPUT_1_8: U300.15 U400.1 U400.19 | length 104.4
  Top Layer w0.5: 120.175,30.132 120.175,33.18 ; 120.175,45.245 120.175,55.278 ; 122.715,75.693 122.715,71.788 125.239,69.264 125.239,65.327
  Top Layer w1: U300.15@88.425,74.836 88.425,76.487 92.235,80.297 121.064,80.297 122.715,78.646 122.715,75.693 ; U400.19@116.365,31.91 116.365,30.259 116.873,29.751 119.794,29.751 120.175,30.132 ; 120.175,33.18 120.175,45.245 ; 120.175,55.278 120.175,60.263 125.239,65.327
  Bottom Layer w0.7: U400.1@113.825,24.29 113.825,26.449 116.365,28.989 U400.19@116.365,31.91
INPUT_9_16: U300.1 U401.1 U401.19 | length 46.7
  Top Layer w0.7: 96.934,60.612 99.22,60.612 101.19,58.642 111.921,58.642 U401.19@116.365,54.199
  Top Layer w1: U300.1@85.885,67.216 85.885,63.533 86.426,62.992 94.554,62.992 96.934,60.612 ; U401.1@113.825,46.579 113.825,48.293 116.365,50.833 U401.19@116.365,54.199
INPUT_17_24: U300.2 U402.1 U402.19 | length 51
  Top Layer w0.7: U300.2@88.425,67.216 89.949,68.74 106.967,68.74 108.618,67.089 108.618,64.047 109.817,62.847 v1(113.825,62.847) ; v1@113.647,63.025 113.297,63.375 111.488,65.184 111.488,72.183 112.787,73.482 115.011,73.482 U402.19@116.365,74.836
  Bottom Layer w0.7: v1@113.825,62.492 v1(113.825,62.847) U402.1@113.825,67.216
INPUT_25_32: P415.9 U300.3 | length 97.1
  Top Layer w0.7: v1(49.182,94.394) 53.842,99.054 73.769,99.054 76.559,96.264 76.559,90.954 78.972,88.541 78.972,87.536 v1@83.98,87.536
  Top Layer w1: v1(92.235,76.233) 94.521,78.519 v1(96.807,78.519)
  Bottom Layer w0.5: 33.18,92.3 36.166,92.3 ; 92.235,73.676 v1@92.235,75.725
  Bottom Layer w0.7: P415.9@31.529,93.595 31.529,93.316 32.545,92.3 33.18,92.3 ; 36.166,92.3 47.088,92.3 v1(49.182,94.394) ; v1(83.98,87.663) 83.98,85.044 88.981,80.043 95.283,80.043 v1(96.807,78.519) ; U300.3@90.965,67.216 90.965,70.137 92.235,71.407 92.235,73.676
INT0: P301.1 U301.33 | length 6.7
  Bottom Layer w1: P301.1@59.914,47.023 60.104,47.023 63.914,43.213 U301.33@65.057,43.213
MUX_C: U801.9 U803.5 | length 17.4
  Top Layer w0.6: v1(199.39,286.385) 199.517,286.258 U803.5@201.689,286.258
  Bottom Layer w0.6: v1@199.898,286.258 202.503,286.258 205.416,283.345 205.416,276.352 205.67,276.098 U801.9@206.616,276.098
MUX_IN: U801.3 U803.4 | length 33.1
  Top Layer w0.6: v1(197.866,271.399) 196.674,272.591 196.674,286.844 197.993,288.163 203.454,288.163 205.359,286.258 U803.4@206.489,286.258
  Bottom Layer w0.6: v1@197.866,271.272 197.866,270.129 198.247,269.748 U801.3@202.578,269.748
NetC100_1: C100.1 C101.1 C102.1 C103.1 C104.1 C105.1 C106.1 P100.1 R100.2 R101.2 R102.2 R103.2 R104.2 R105.2 R106.2 | length 162.4
  Bottom Layer w1: C105.1@73.282,285.75 73.282,287.486 ; C103.1@80.388,287.909 80.388,291.247 C104.1@80.733,291.592 ; C101.1@103.381,285.75 103.381,287.486 ; R100.2@105.577,296.398 105.577,289.682 103.381,287.486 ; P100.1@108.966,281.813 108.966,283.21 113.03,287.274 113.03,298.194 111.377,299.847 63.56,299.847 R106.2@60.111,296.398 62.592,296.398 65.535,293.455 C106.1@65.535,291.592 66.698,290.429 R105.2@67.858,290.429 70.339,290.429 73.282,287.486 ; 73.282,287.486 75.266,289.47 R104.2@75.266,296.398 77.747,296.398 80.733,293.412 C104.1@80.733,291.592 ; C104.1@80.733,291.592 81.896,290.429 R103.2@82.907,290.429 85.388,290.429 87.4,288.417 89.263,288.417 90.422,289.576 R102.2@90.422,296.398 92.902,296.398 95.93,293.37 C102.1@95.93,291.592 97.093,290.429 R101.2@97.957,290.429 100.438,290.429 103.381,287.486
NetC100_2: C100.2 P100.3 R100.3 | length 13.8
  Bottom Layer w1: P100.3@103.886,281.813 103.886,283.083 108.077,287.274 R100.3@108.077,293.898
NetC101_2: C101.2 P100.4 R101.3 | length 6.5
  Bottom Layer w1: R101.3@100.457,287.929 100.457,284.226 101.346,283.337 P100.4@101.346,281.813
NetC102_2: C102.2 P100.5 R102.3 | length 14.5
  Bottom Layer w1: R102.3@92.922,293.898 92.922,290.237 98.806,284.353 P100.5@98.806,281.813
NetC103_2: C103.2 P100.6 R103.3 | length 17.8
  Bottom Layer w1: C103.2@83.188,287.909 85.387,287.909 R103.3@85.407,287.929 85.598,287.739 85.598,286.004 93.98,286.004 96.266,283.718 P100.6@96.266,281.813
NetC104_2: C104.2 P100.7 R104.3 | length 26.7
  Bottom Layer w1: R104.3@77.766,293.898 77.851,293.813 77.851,285.623 78.883,284.591 92.472,284.591 93.726,283.337 P100.7@93.726,281.813
NetC105_2: C105.2 P100.8 R105.3 | length 25.4
  Bottom Layer w1: R105.3@70.358,287.929 70.358,284.48 71.501,283.337 89.662,283.337 P100.8@91.186,281.813
NetC106_2: C106.2 P100.9 R106.3 | length 34.4
  Bottom Layer w1: R106.3@62.611,293.898 62.611,288.163 68.961,281.813 P100.9@88.646,281.813
NetC107_1: C107.1 P102.2 R107.2 | length 6.8
  Bottom Layer w1: R107.2@68.232,9.943 68.232,8.074 P102.2@69.669,6.637 70.769,5.537 C107.1@70.769,4.224
NetC107_2: C107.2 P102.1 R109.2 | length 6.7
  Bottom Layer w1: C107.2@73.569,4.224 73.569,5.537 P102.1@74.669,6.637 75.979,7.947 R109.2@75.979,9.943
NetC202_2: C202.2 R202.1 R203.2 | length 4.4
  Bottom Layer w1: R203.2@34.257,40.593 R202.1@34.257,42.625 36.609,42.625 C202.2@36.609,42.622
NetC203_2: C203.2 R202.2 U200.5 | length 16.6
  Bottom Layer w0.5: 22.258,41.609 25.147,41.609
  Bottom Layer w1: U200.5@16.67,42.879 19.972,42.879 21.242,41.609 22.258,41.609 ; 25.147,41.609 27.719,41.609 28.732,42.622 C203.2@30.132,42.622 30.135,42.625 R202.2@32.357,42.625
NetC204_1: C204.1 P200.2 R206.2 | length 5.9
  Bottom Layer w1: P200.2@7.145,47.999 8.582,46.562 R206.2@10.07,46.562 10.07,48.595 C204.1@10.32,48.845
NetC204_2: C204.2 P200.1 R204.2 | length 5.9
  Bottom Layer w1: P200.1@7.145,52.999 8.201,54.055 R204.2@10.07,54.055 10.07,51.895 C204.2@10.32,51.645
NetC205_1: C205.1 P201.2 R211.2 | length 5.9
  Bottom Layer w1: P201.2@7.018,42.371 8.201,43.554 R211.2@10.07,43.554 10.07,41.521 C205.1@10.32,41.271
NetC205_2: C205.2 P201.1 R208.2 | length 5.9
  Bottom Layer w1: P201.1@7.018,37.371 8.201,36.188 R208.2@10.07,36.188 10.07,38.221 C205.2@10.32,38.471
NetC206_2: C206.2 R209.2 R210.1 | length 4.2
  Bottom Layer w1: R210.1@31.844,48.266 33.892,48.266 C206.2@33.942,48.216 35.99,48.216 R209.2@36.04,48.266
NetC207_2: C207.2 R210.2 U200.12 | length 5.8
  Bottom Layer w1: U200.12@24.29,47.959 27.462,47.959 C207.2@27.719,48.216 29.894,48.216 R210.2@29.944,48.266
NetC210_1: C210.1 P202.2 R215.2 | length 5.9
  Bottom Layer w1: R215.2@118.077,105.697 120.389,105.697 P202.2@120.429,105.737 122.377,105.737 C210.1@123.477,106.837
NetC210_2: C210.2 P202.1 R213.2 | length 5.4
  Bottom Layer w1: P202.1@120.429,110.737 122.377,110.737 C210.2@123.227,109.887 ; R213.2@123.227,111.793 C210.2@123.227,109.887 ; C210.2@123.477,109.637 C210.2@123.227,109.887
NetC211_1: C211.1 P204.2 R219.2 | length 6
  Bottom Layer w1: R219.2@118.077,121.572 120.291,121.572 P204.2@120.302,121.561 122.094,121.561 C211.1@123.477,120.178
NetC211_2: C211.2 P204.1 R217.2 | length 5.5
  Bottom Layer w1: P204.1@120.302,116.561 122.66,116.561 C211.2@123.227,117.128 ; R217.2@123.227,115.095 C211.2@123.227,117.128 ; C211.2@123.477,117.378 C211.2@123.227,117.128